# Altium PCB FUFO.PcbDoc
Units mil, origin at the board's own origin, x right, y up, seen from the top; angles counter-clockwise.
Board outline 2900 x 2900 mil, 2 copper layers (Top Layer, Bottom Layer); 36 components, 42 nets, 191 pads, 4 vias.
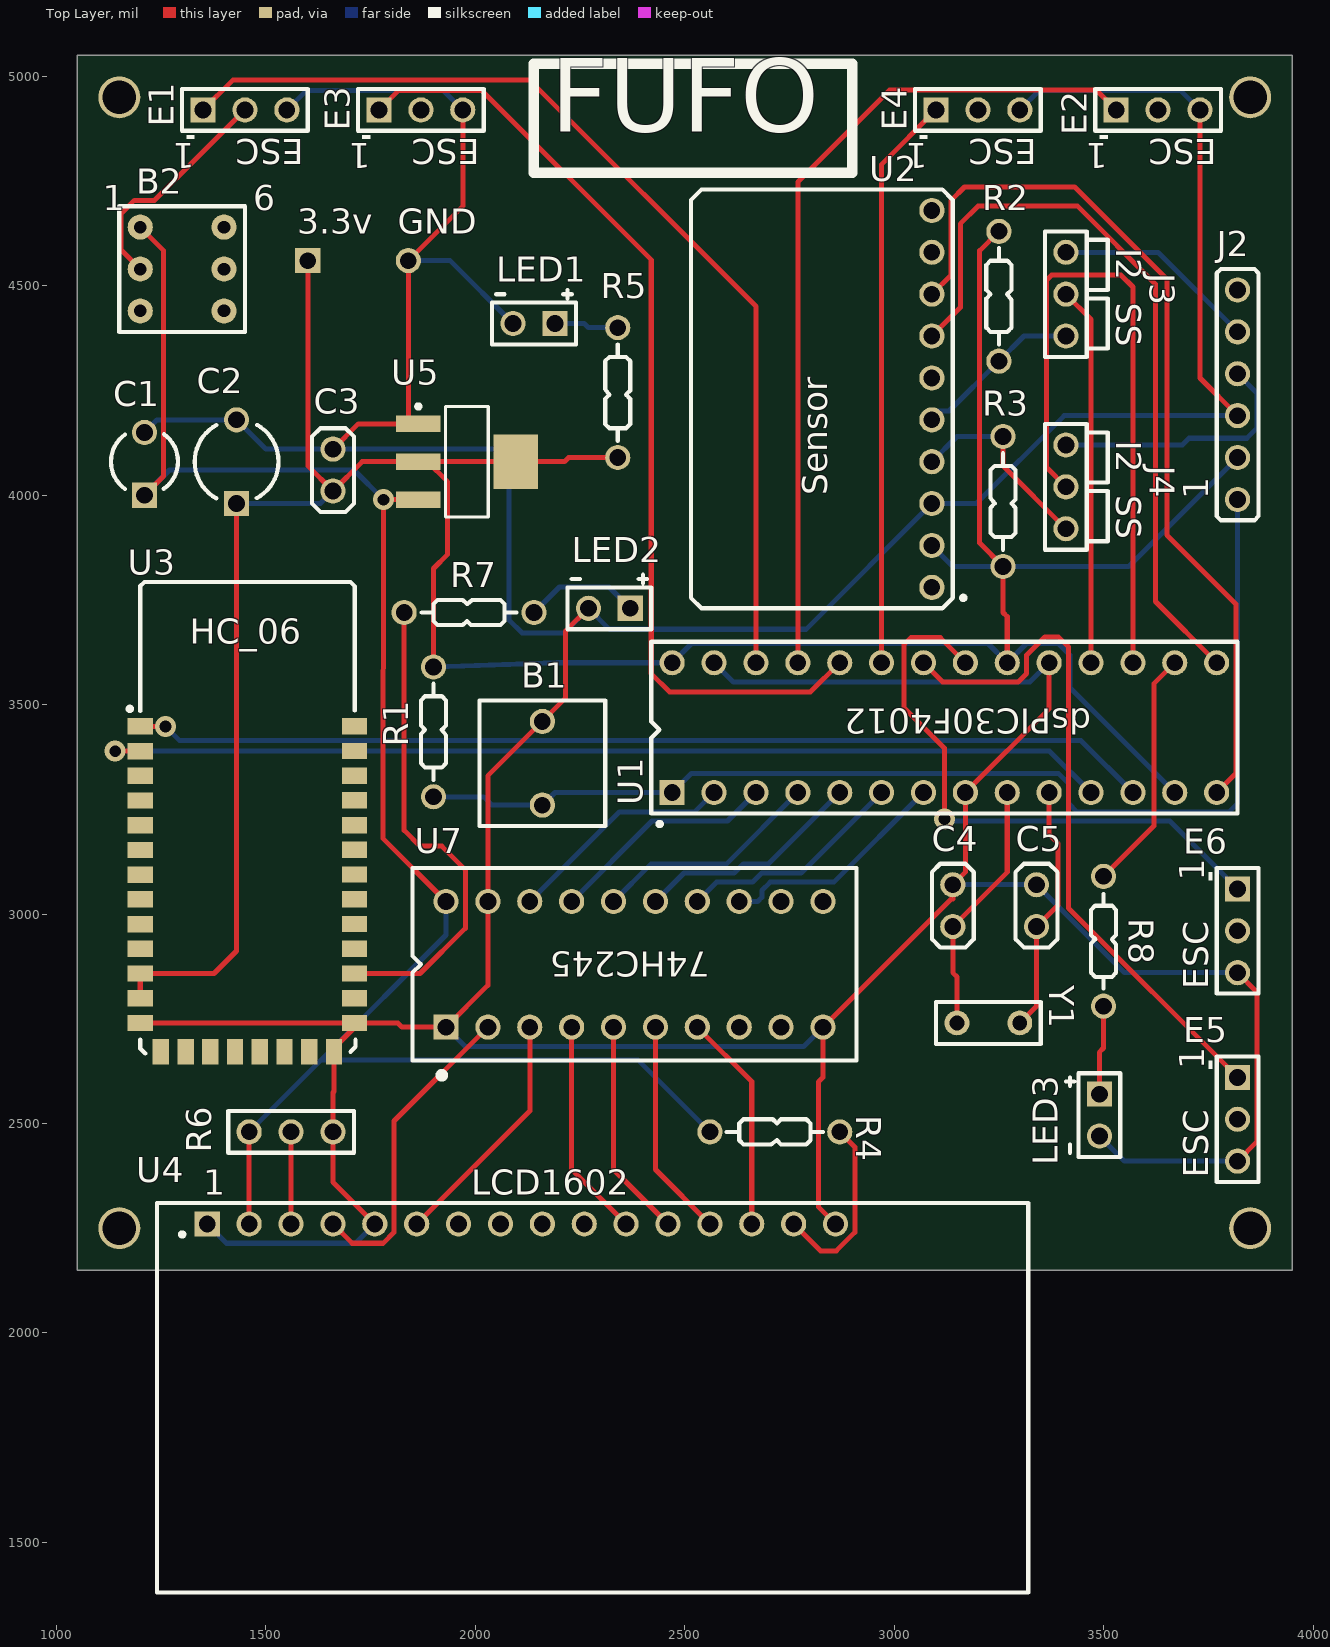
[diagram p0: Top Layer view]
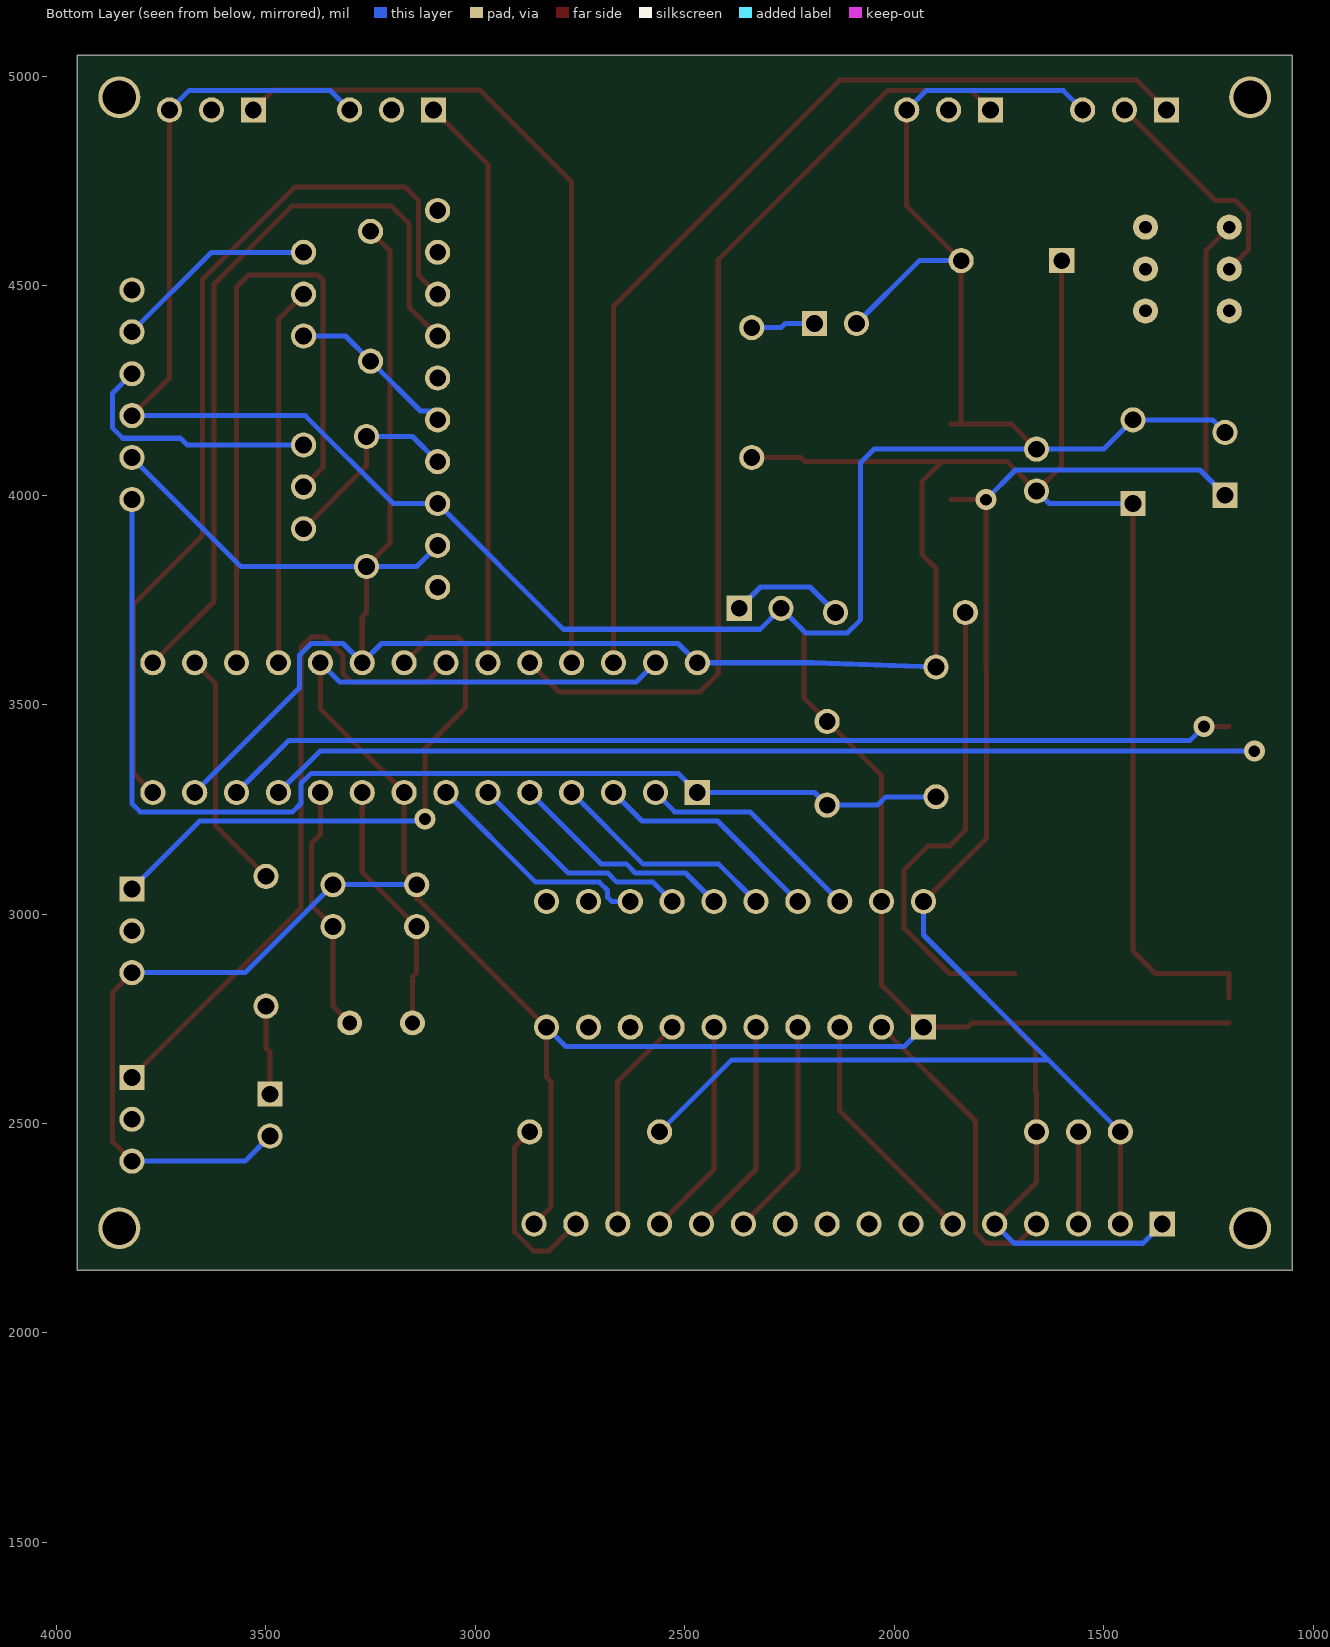
[diagram p1: Bottom Layer view, seen from below]

## Layer stack, top to bottom
Top Layer: signal copper 1.4
Dielectric: dielectric 12.6, FR-4, Dk 4.8
Bottom Layer: signal copper 1.4

## Board outline
1050,2150 3950,2150 3950,5050 1050,5050

## Design rules (kind name [scope] priority, off if disabled: settings)
Clearance [All] p1: gap=10
HoleSize [All] p1: absolutevalues=TRUE maxlimit=200 minlimit=1 maxpercent=80.000 minpercent=20.000
MinimumSolderMaskSliver [All] p1: minsoldermaskwidth=7
PolygonConnect [All] p1: connectstyle=Relief reliefconductorwidth=10 reliefentries=4 polygonreliefangle="90 Angle"
RoutingVias [All] p1: holewidth=28 width=50 viastyle="Through Hole" minholewidth=10 minwidth=10 maxholewidth=200 maxwidth=200
SilkToSilkClearance [All] p1: silktosilkclearance=4
SilkscreenOverComponentPads [All] p1: minsilkscreentomaskgap=4
SolderMaskExpansion [All] p1: expansion=5
Width [All] p1: maxlimit=100 minlimit=5 preferedwidth=12
24 further rules are at their usual default settings.

## Components (designator, comment, footprint, x,y, rotation, side; value= is the part's Value field where it differs from the comment)
3.3v "3.3v" 3.3v 1600,4560 r90 top
B1 "Button1" Button1 2160,3360 r180 top
B2 "Button2" Button2 1300,4540 r0 top
C1 "10uF" Capacitor2 1210,4080 r180 top
C2 "22uF" Capacitor3 1430,4080 r180 top
C3 "104pF" Capacitor1 1660,4060 r0 top
C4 "33uF" Capacitor1 3140,3020 r0 top
C5 "33uF" Capacitor1 3340,3020 r0 top
E1 "ESC" ESC 1450,5020 r90 top
E2 "ESC" ESC 3630,5020 r90 top
E3 "ESC" ESC 1870,5020 r90 top
E4 "ESC" ESC 3200,5020 r90 top
E5 "ESC" ESC 3920,2510 r0 top
E6 "ESC" ESC 3920,2960 r0 top
GND "GND" GND 1840,4560 r90 top
J2 "JAC_ICD2" JAC_ICD2 3820,4240 r180 top
J3 "JAC_CV" JAC_CV 3410,4480 r180 top
J4 "JAC_CV" JAC_CV 3410,4020 r180 top
LED1 "Led" LED 2140,4360 r270 top
LED2 "Led" LED 2320,3680 r270 top
LED3 "Led" LED 3540,2520 r0 top
R1 "4.7k" Resistor 1900,3440 r180 top
R2 "4.7k" Resistor 3250,4480 r180 top
R3 "4.7k" Resistor 3260,3980 r0 top
R4 "560" Resistor 2720,2480 r90 top
R5 "560" Resistor 2340,4240 r0 top
R6 "10k" BienTro 1560,2480 r270 top
R7 "560" Resistor 1980,3720 r270 top
R8 "560" Resistor 3500,2940 r180 top
U1 "dsPIC30F4012" dsPIC30F4012 3120,3440 r90 top
U2 "Sensor" Sensor 2840,4180 r180 top
U3 "Module_Bluetooth" Module_Bluetooth 1200,2740 r0 top
U4 "LCD1602" LCD1602 2060,2760 r90 top
U5 "L1117-3.3" "L1117 - 3.3" 1980,4080 r0 top
U7 "74HC245" 74HC245 2380,2880 r90 top
Y1 "7.3728MHz" XTAL 3300,2740 r180 top

## Footprints (in the part's own frame and the unit in brackets; to place one, negate y for a bottom-side part, rotate by r counter-clockwise, add the part's x,y. Pads: shape width x height; smd on the part's side, far side on the other; paste and mask are expansions set on the pad)
3.3v [mil]
  rect 60x60 hole 40: 0(0,0)
74HC245 [mil]
  rect 60x60 hole 40: 1(-150,450)
  round 60 hole 40: 2(-150,350) 3(-150,250) 4(-150,150) 5(-150,50) 6(-150,-50) 7(-150,-150) 8(-150,-250) 9(-150,-350) 10(-150,-450) 11(150,-450) 12(150,-350) 13(150,-250) 14(150,-150) 15(150,-50) 16(150,50) 17(150,150) 18(150,250) 19(150,350) 20(150,450)
  silkscreen extent -270,-530 230,530
BienTro [mil]
  round 60 hole 40: 0(0,100) 1(0,0) 2(0,-100)
  silkscreen extent -50,-150 50,150
Button1 [mil]
  round 60 hole 40: 1(0,-100) 2(0,100)
  silkscreen extent -150,-150 150,150
Button2 [mil]
  round 60 hole 30: 1(-100,100) 2(-100,0) 3(-100,-100) 4(100,-100) 5(100,0) 6(100,100)
  silkscreen extent -150,-150 150,150
Capacitor1 [mil]
  round 60 hole 40: 1(0,50) 2(0,-50)
  silkscreen extent -50,-100 50,100
Capacitor2 [mil]
  rect 60x60 hole 40: 1(0,80)
  round 60 hole 40: 2(0,-70)
  silkscreen extent -80,-66 80,65
Capacitor3 [mil]
  rect 60x60 hole 40: 1(0,100)
  round 60 hole 40: 2(0,-100)
  silkscreen extent -100,-88 100,87
dsPIC30F4012 [mil]
  rect 60x60 hole 40: 1(-150,650)
  round 60 hole 40: 2(-150,550) 3(-150,450) 4(-150,350) 5(-150,250) 6(-150,150) 7(-150,50) 8(-150,-50) 9(-150,-150) 10(-150,-250) 11(-150,-350) 12(-150,-450) 13(-150,-550) 14(-150,-650) 15(160,-650) 16(160,-550) 17(160,-450) 18(160,-350) 19(160,-250) 20(160,-150) 21(160,-50) 22(160,50) 23(160,150) 24(160,250) 25(160,350) 26(160,450) 27(160,550) 28(160,650)
  silkscreen extent -230,-700 210,700
ESC [mil]
  rect 60x60 hole 40: 1(-100,100)
  round 60 hole 40: 2(-100,0) 3(-100,-100)
  silkscreen extent -170,-150 -50,150
GND [mil]
  round 60 hole 40: 0(0,0)
JAC_CV [mil]
  round 60 hole 40: 1(0,100) 2(0,0) 3(0,-100)
  silkscreen extent -100,-150 50,150
JAC_ICD2 [mil]
  round 60 hole 40: 1(0,250) 2(0,150) 3(0,50) 4(0,-50) 5(0,-150) 6(0,-250)
  silkscreen extent -50,-300 50,300
"L1117 - 3.3" [mm] "SOT223, 4-Leads, Body 6.5x3.5mm, Pitch 2.3mm, Lead Span 7mm, IPC Low Density"
  rect 2.7x1 smd: 1(-2.95,2.3) 2(-2.95,0) 3(-2.95,-2.3)
  rect 2.7x3.3 smd: 4(2.95,0)
  silkscreen extent -3.07,-3.35 1.3,3.47, body extent -1.85,-3.35 1.85,3.35, height 1.7
LCD1602 [mil]
  rect 60x60 hole 40: 1(-500,700)
  round 60 hole 40: 2(-500,600) 3(-500,500) 4(-500,400) 5(-500,300) 6(-500,200) 7(-500,100) 8(-500,0) 9(-500,-100) 10(-500,-200) 11(-500,-300) 12(-500,-400) 13(-500,-500) 14(-500,-600) 15(-500,-700) 16(-500,-800)
  silkscreen extent -1380,-1260 -450,820
LED [mil]
  rect 60x60 hole 40: 1(-50,50)
  round 60 hole 40: 2(-50,-50)
  silkscreen extent -130,-100 0,100
Module_Bluetooth [mil]
  rect 60x39 smd: 1(0,708) 2(0,649) 3(0,590) 4(0,531) 5(0,472) 6(0,413) 7(0,354) 8(0,295) 9(0,236) 10(0,177) 11(0,118) 12(0,59) 13(0,0) 22(511.68,0) 23(511.68,59.04) 24(511.68,118.08) 25(511.68,177.12) 26(511.68,236.16) 27(511.68,295.2) 28(511.68,354.24) 29(511.68,413.28) 30(511.68,472.32) 31(511.68,531.36) 32(511.68,590.4) 33(511.68,649.44) 34(511.68,708.48)
  rect 39x60 smd: 14(49.2,-68.88) 15(108.24,-68.88) 16(167.28,-68.88) 17(226.32,-68.88) 18(285.36,-68.88) 19(344.4,-68.88) 20(403.44,-68.88) 21(462.48,-68.88)
  silkscreen extent -30,-73 514,1053
Resistor [mil]
  round 60 hole 40: 1(0,160) 2(0,-150)
  silkscreen extent -30,-110 30,120
Sensor [mil]
  round 60 hole 40: 1(-250,400) 2(-250,300) 3(-250,200) 4(-250,100) 5(-250,0) 6(-250,-100) 7(-250,-200) 8(-250,-300) 9(-250,-400) 10(-250,-500)
  silkscreen extent -330,-550 325,450
XTAL [mm] "Connector; Header; 2 Position"
  round 1.5 hole 0.9: 1(0,0) 2(3.81,0)
  silkscreen extent -1.27,-1.27 5.08,1.27

## Part data
C1: library part Capacitor2, "Capacitor2"
C2: library part Capacitor3, "Capacitor3"
C3 C4 C5: library part Capacitor1, "Capacitor1"
R1 R2 R3 R4 R5 R7 R8: library part Resistor
R6: library part BienTro
Y1: library part XTAL

## Free pads (board coordinates)
  round 100 hole 80: 0(1150,2250) 1(3850,2250) 2(3850,4950) 3(1150,4950)

## Via types
v1: diameter 50, hole 28, Top Layer to Bottom Layer, 4 vias

## Nets (pads, with @x,y where several pads share a name; then routed paths per layer and width w, separated by ;. In a path a pad name is that pad's centre, name@x,y a point inside that pad or via, vN(x,y) a via of type N, cw(c..) or ccw(c..) an arc to the next point about the centre after c; other vN are vias at no path point)
3.3V: 3.3v.0 C2.1 C3.2 J2.2 R1.2 R2.2 R3.2 R5.2 U1.13 U1.20 U1.28 U2.2 U3.11 U3.12 U5.2 U5.4 | length 7411.2
  Top Layer w12: U3.12 U3.11 1376,2858 1430,2912 C2.1 ; 3.3v.0 1600,4070 C3.2 1730,4080 U5.2 ; R1.2 1900,3825 1934,3859 1934,4032 U5.2@1886,4080 ; R5.2 2223,4090 2213,4080 U5.4 U5.2@1886,4080 ; R2.2 3204,4584 3204,3886 R3.2 3260,3720 3270,3710 U1.20 ; U5.2 U5.2@1886,4080 ; U5.2 U5.2@1886,4080
  Bottom Layer w12: C2.1 1630,3980 C3.2 ; R1.2 2195,3600 U1.28 2516,3646 3224,3646 U1.20 3316,3646 3392,3646 3420,3618 3420,3540 U1.13 ; U2.2 3140,3830 R3.2 3560,3830 J2.2
GND: B1.1 C1.2 C2.2 C3.1 C4.1 C5.1 E1.3 E2.3 E3.3 E4.3 E5.3 E6.3 GND.0 J2.3 LED1.2 LED2.2 LED3.2 R6.0 U1.8 U1.19 U1.27 U2.3 U3.13 U3.21 U3.22 U4.1 U4.5 U4.16 U5.1 U7.1 U7.10 U7.19 | length 14200.7
  Top Layer w12: U3.13 U3.22 ; C3.1 1720.55,4170.55 U5.1@1840,4170.55 ; U4.5 1660,2360 R6.0 1660,2574 1662.48,2576.48 U3.21 1662.48,2680 1711.68,2729.2 U3.22 ; E3.3 1970,4690 GND.0 U5.1@1840,4170.55 ; LED2.2 2215,3675 2215,3515 B1.1 2030,3330 U7.19 2030,2830 U7.1 1825,2730 1815,2740 U3.22 ; U4.16 2819,2301 2819,2599 2830,2610 U7.10 3136,3036 3140,3036 C4.1 3170,3100 U1.8 3370,3490 U1.19 ; E2.3 3730,4280 J2.3 ; E5.3 3866,2456 3866,2814 E6.3 ; U5.1@1840,4170.55 U5.1 U5.1@1840,4170.55
  Bottom Layer w12: C1.2 1240,4180 C2.2 1500,4110 C3.1 2048,4110 2080,4078 2080,3703 2112,3671 2211,3671 LED2.2 2320,3680 2790,3680 U2.3 3196,3980 3406,4190 J2.3 ; U4.1 1406,2214 1714,2214 U4.5 ; E1.3 1596,4966 1924,4966 E3.3 ; GND.0 1940,4560 LED1.2 ; U7.1 1976,2684 2784,2684 U7.10 ; U1.27 2616,3554 3324,3554 U1.19 ; C4.1 C5.1 3550,2860 E6.3 ; E4.3 3346,4966 3684,4966 E2.3 ; LED3.2 3550,2410 E5.3
I_LCD_DB4: U1.4 U7.16 | length 547.7
  Bottom Layer w12: U7.16 2420,3120 2600,3120 U1.4
I_LCD_DB5: U1.5 U7.15 | length 547.7
  Bottom Layer w12: U7.15 2498,3098 2618,3098 2640,3120 2700,3120 U1.5
I_LCD_DB6: U1.6 U7.14 | length 547.7
  Bottom Layer w12: U7.14 2576,3076 2662,3076 2684,3098 2778,3098 U1.6
I_LCD_DB7: U1.7 U7.13 | length 557.1
  Bottom Layer w12: U7.13 2674,3030 2684,3040 2684,3056 2704,3076 2856,3076 U1.7
I_LCD_E: U1.3 U7.17 | length 547.7
  Bottom Layer w12: U7.17 2422,3222 2602,3222 U1.3
I_LCD_RS: U1.2 U7.18 | length 547.7
  Bottom Layer w12: U7.18 2344,3244 2524,3244 U1.2
LED: R7.2 U3.24 | length 1154
  Top Layer w12: U3.24 1868.08,2858.08 1976,2966 1976,3106 1920,3162 1868,3162 1830,3200 R7.2
MCLR: B1.2 J2.1 R1.1 U1.1 | length 2760.3
  Bottom Layer w12: R1.1 2020,3280 2040,3260 B1.2 2190,3290 U1.1 2516,3336 3392,3336 3416,3312 3416,3264 3436,3244 3800,3244 3820,3264 J2.1
NetB2_2: B2.2 E1.2 | length 549.8
  Top Layer w12: B2.2 1154,4586 1154,4672 1186,4704 1234,4704 E1.2
NetLED1_1: LED1.1 R5.1 | length 154.1
  Bottom Layer w12: LED1.1 2260,4410 2270,4400 R5.1
NetLED2_1: LED2.1 R7.1 | length 276.4
  Bottom Layer w12: R7.1 2201,3781 2319,3781 LED2.1
NetLED3_1: LED3.1 R8.1 | length 214.1
  Top Layer w12: LED3.1 3490,2670 3500,2680 R8.1
NetR4_2: R4.2 U4.15 | length 445.6
  Top Layer w12: U4.15 2824,2196 2862,2196 2906,2240 2906,2444 R4.2
NetR6_1: R6.1 U4.3 | length 220
  Top Layer w12: U4.3 R6.1
O_LCD_DB4: U4.11 U7.4 | length 523.8
  Top Layer w12: U7.4 2230,2390 U4.11
O_LCD_DB5: U4.12 U7.5 | length 523.8
  Top Layer w12: U7.5 2330,2390 U4.12
O_LCD_DB6: U4.13 U7.6 | length 523.8
  Top Layer w12: U7.6 2430,2390 U4.13
O_LCD_DB7: U4.14 U7.7 | length 523.8
  Top Layer w12: U7.7 2660,2600 U4.14
O_LCD_E: U4.6 U7.3 | length 581.8
  Top Layer w12: U4.6 2130,2530 U7.3
O_LCD_RS: U4.4 U7.2 | length 758.6
  Top Layer w12: U4.4 1706,2214 1780,2214 1806,2240 1806,2506 U7.2
OSC1: C4.2 U1.9 Y1.2 | length 608
  Top Layer w12: Y1.2 3150,2850 3140,2860 C4.2 3270,3100 U1.9
OSC2: C5.2 U1.10 Y1.1 | length 596.4
  Top Layer w12: Y1.1 3340,2780 C5.2 3391,3021 3391,3169 3370,3190 U1.10
PGC: J2.5 J3.3 | length 488.7
  Bottom Layer w12: J3.3 3630,4580 J2.5
PGD: J2.4 J4.3 | length 621.6
  Bottom Layer w12: J4.3 3688,4120 3704,4136 3842,4136 3866,4160 3866,4244 J2.4
PWM1H: E2.1 U1.25 | length 2018.2
  Top Layer w12: U1.25 2770,4748 2989,4967 3483,4967 E2.1
PWM1L: E1.1 U1.26 | length 2424.1
  Top Layer w12: E1.1 1421,4991 2130,4991 2670,4451 U1.26
PWM2H: E4.1 U1.23 | length 1373.8
  Top Layer w12: U1.23 2970,4790 E4.1
PWM2L: E3.1 U1.24 | length 2321.6
  Top Layer w12: E3.1 1816,4966 2016,4966 2420,4562 2420,3574 2464,3530 2800,3530 U1.24
PWM3H: E6.1 U1.21 | length 1403.4
  Top Layer w12: v1(3120,3227) 3120,3396 3024,3492 3024,3644 3040,3660 3110,3660 U1.21
  Bottom Layer w12: v1(3120,3227) 3125,3222 3658,3222 E6.1
PWM3L: E5.1 U1.22 | length 1640.8
  Top Layer w12: U1.22 3116,3554 3296,3554 3316,3574 3316,3618 3360,3662 3392,3662 3416,3638 3416,3014 E5.1
RD0: U1.15 U2.7 | length 1821.1
  Top Layer w12: U2.7 3158,4448 3158,4648 3200,4690 3438,4690 3624,4504 3624,3746 U1.15
RD1: U1.14 U2.8 | length 2175.8
  Top Layer w12: U2.8 3136,4526 3136,4704 3168,4736 3431,4736 3651,4516 3651,3905 3816,3740 3816,3336 U1.14
RE8: R8.2 U1.16 | length 580.4
  Top Layer w12: R8.2 3620,3210 3620,3550 U1.16
RX: U1.12 U3.1 | length 2435.4
  Top Layer w12: U3.1 v1(1260,3448)
  Bottom Layer w12: v1(1260,3448) 1294,3414 3446,3414 U1.12
SCL: J4.1 R3.1 U2.4 | length 477
  Top Layer w12: R3.1 3260,4070 J4.1
  Bottom Layer w12: U2.4 3150,4140 R3.1
SCL_PGD: J4.2 U1.17 | length 1633
  Top Layer w12: J4.2 3364,4066 3364,4514 3376,4526 3541,4526 3570,4497 U1.17
SDA: J3.1 R2.1 U2.5 | length 415.1
  Bottom Layer w12: U2.5 3090,4201 3131,4201 R2.1 3310,4380 J3.1
SDA_PGC: J3.2 U1.18 | length 904.9
  Top Layer w12: J3.2 3470,4420 U1.18
TX: U1.11 U3.2 | length 2431
  Top Layer w12: v1(1140,3389) U3.2
  Bottom Layer w12: v1(1140,3389) 3371,3389 U1.11
VCC: B2.1 C1.1 R4.1 R6.2 U4.2 U5.3 U7.20 | length 4618.9
  Top Layer w12: B2.1 1256,4584 1256,4046 C1.1 ; U4.2 R6.2 ; U5.3 v1(1781,3989.45) 1780,3180 U7.20
  Bottom Layer w12: C1.1 1270,4060 1710.45,4060 v1(1781,3989.45) ; U7.20 1930,2950 1632,2652 ; R4.1 2388,2652 1632,2652 ; 1632,2652 R6.2 1632,2652
pads on no net: B2.3 B2.4 B2.5 B2.6 E2.2 E3.2 E4.2 E5.2 E6.2 J2.6 U2.1 U2.6 U2.9 U2.10 U3.3 U3.4 U3.5 U3.6 U3.7 U3.8 U3.9 U3.10 U3.14 U3.15 U3.16 U3.17 U3.18 U3.19 U3.20 U3.23 U3.25 U3.26 U3.27 U3.28 U3.29 U3.30 U3.31 U3.32 U3.33 U3.34 U4.7 U4.8 U4.9 U4.10 U7.8 U7.9 U7.11 U7.12

## Silkscreen, mask and mechanical layers (free items; w line width, h text height)
Top Overlay:
  lines w25: 2140,4770 2140,5030 2900,5030 2900,4770 2140,4770
  text "1" at 1330,4840 h60 r180
  text "1" at 1750,4840 h60 r180
  text "1" at 3080,4840 h60 r180
  text "1" at 3510,4840 h60 r180
  text "FUFO" at 2180,4810 h300
  text "1" at 3740,3080 h60 r90
  text "1" at 3740,2630 h60 r90
  text "1" at 1350,2330 h60
Mechanical 1:
  lines w10: 1050,2150 1050,5050 3740,5050 3950,5050 3950,2150 1050,2150

## Text inside footprints (layer, text, board x,y; h text height)
B2: Top Overlay "6" at 1470,4680 h60; Top Overlay "1" at 1110,4680 h60
J2: Top Overlay "1" at 3750,3990 h60 r90
J3: Top Overlay "SS" at 3530,4460 h60 r270; Top Overlay "I2" at 3530,4590 h60 r270
J4: Top Overlay "SS" at 3530,4000 h60 r270; Top Overlay "I2" at 3530,4130 h60 r270
U3: Top Overlay "HC_06" at 1318.08,3645.28 h60